# EAGLE board SCX3 (EAGLE 7.7.0)
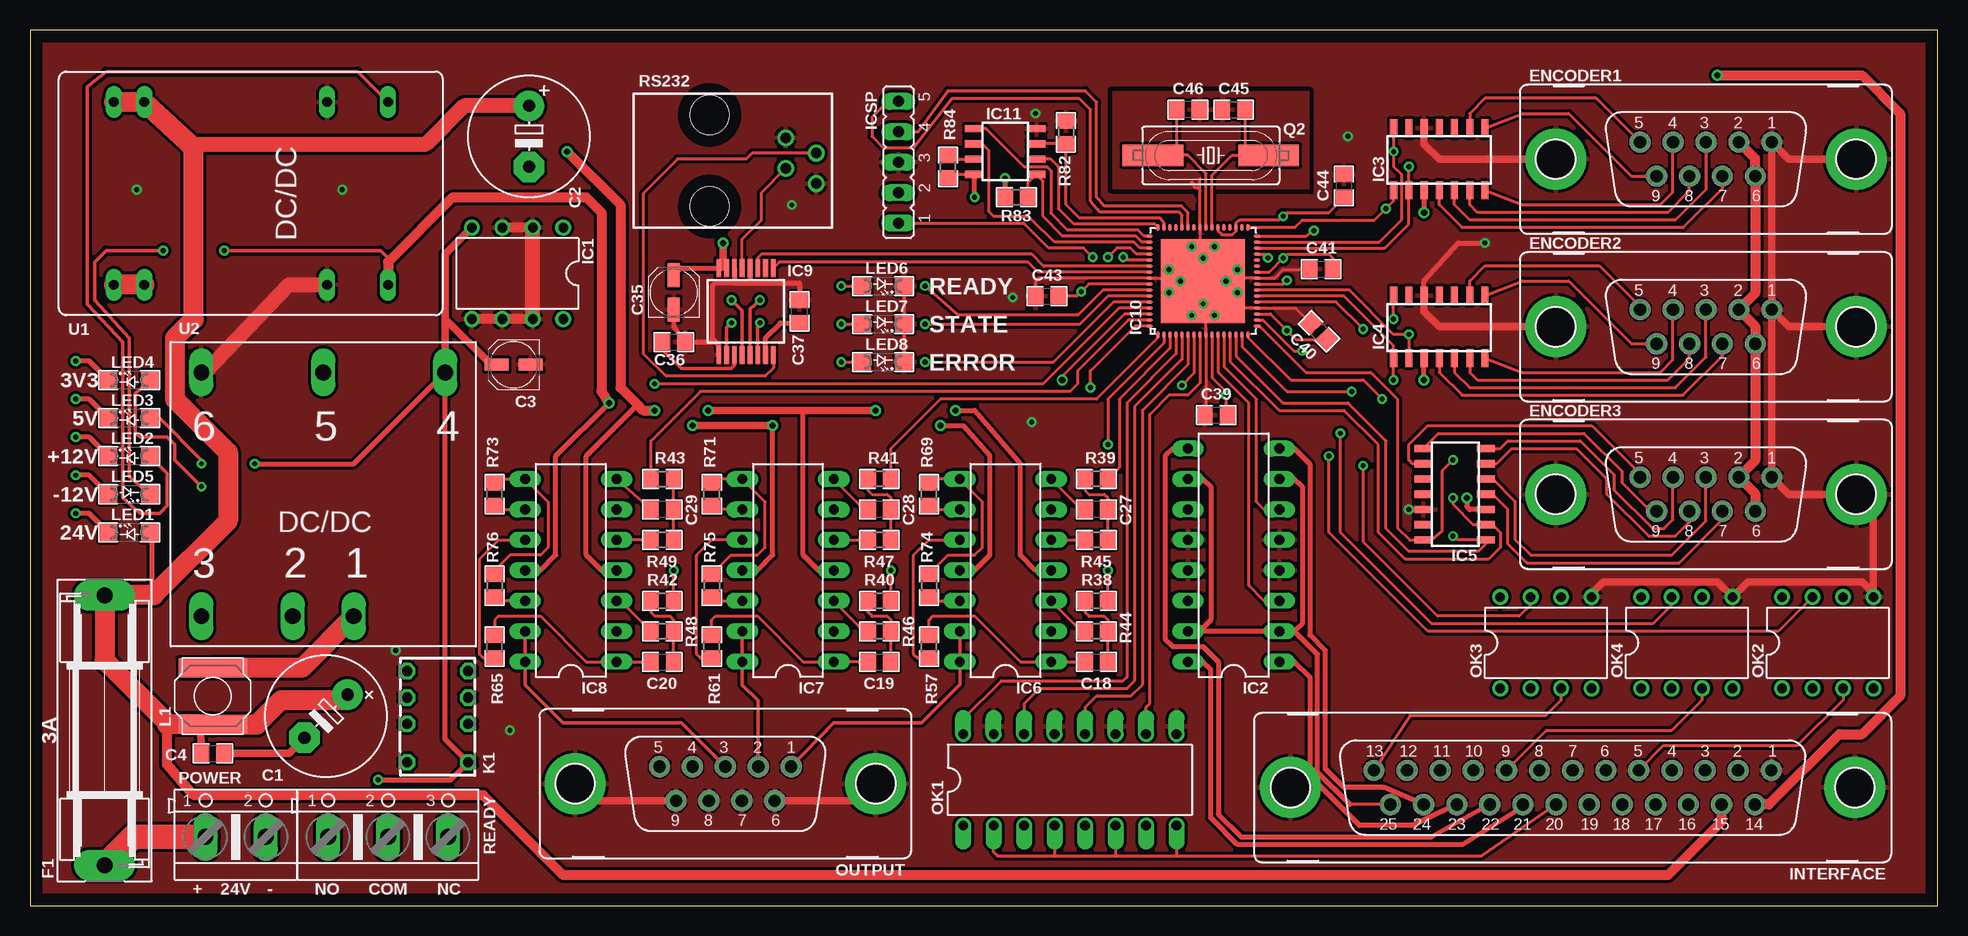
[diagram p0: board, top side]
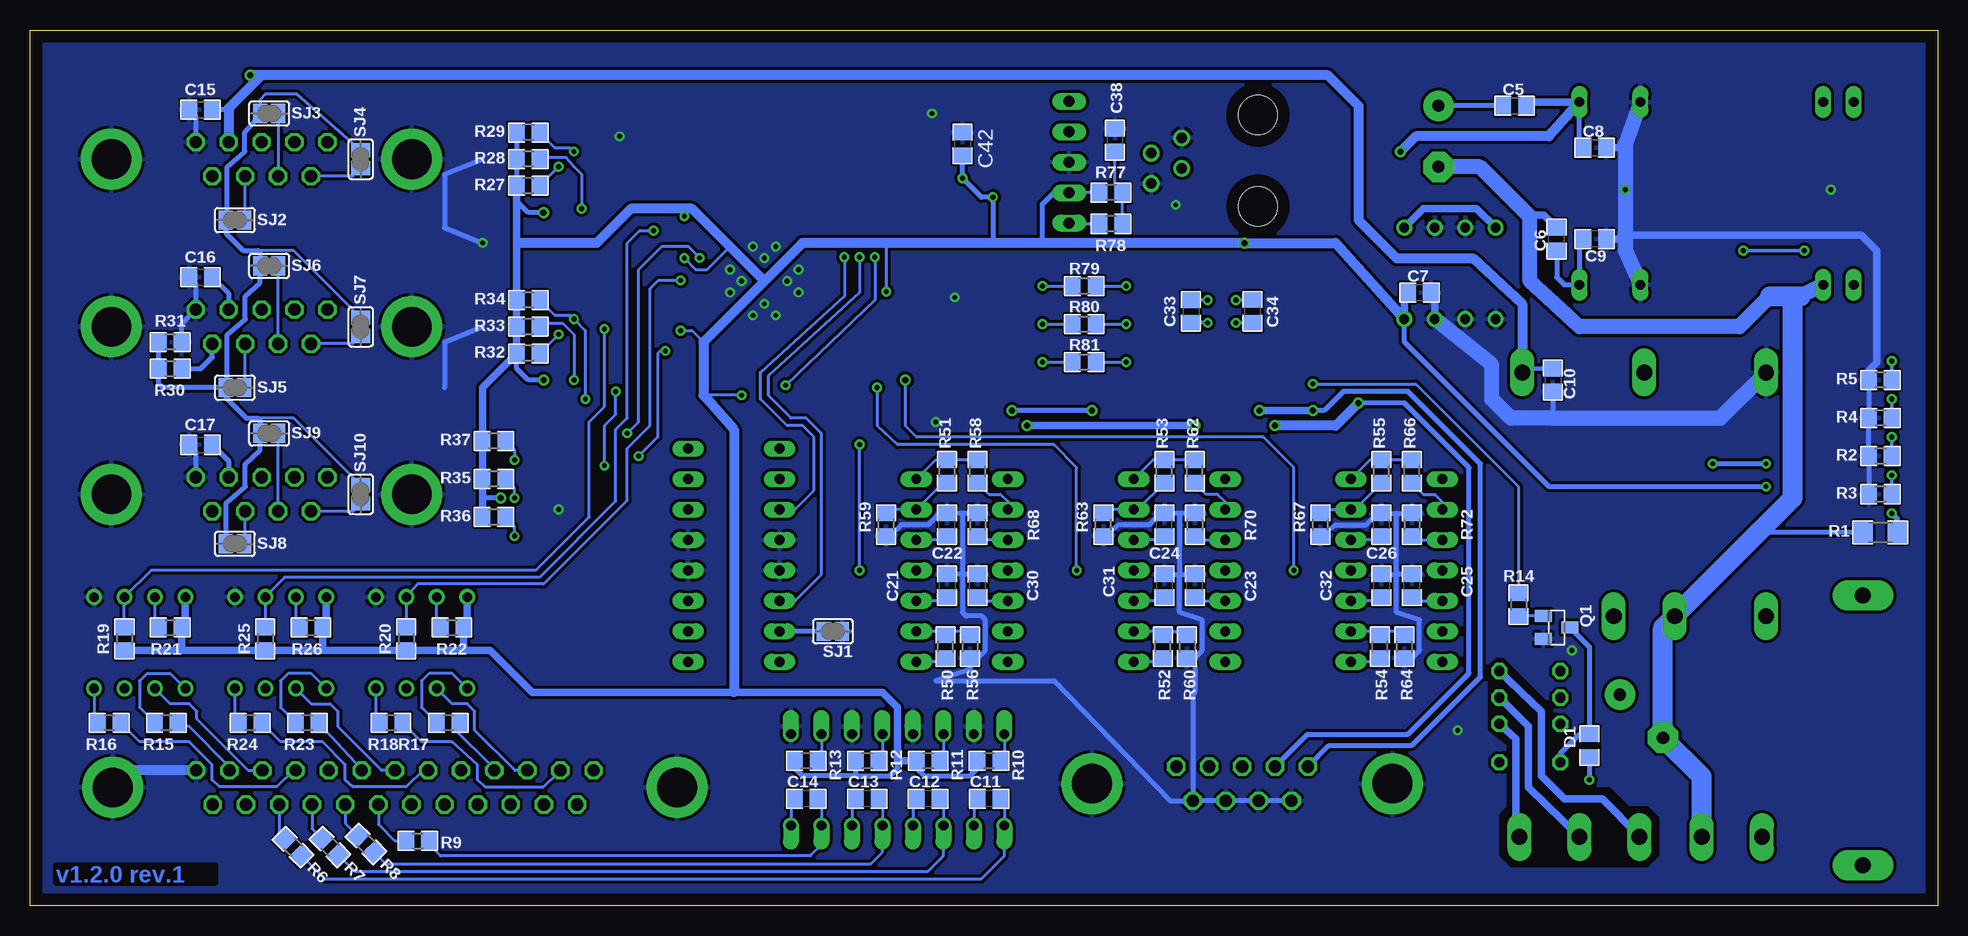
[diagram p1: board, bottom side, seen from below]

Size 159 x 73 mm. Coordinates in mm from the lower left corner, seen from the top.
Outline: 0,0 159,0 159,73 0,73 0,0
Copper layers (1*16): Top 0.035mm / dielectric 1.5mm / Bottom 0.035mm
Design rules "default *": minimum track width 0.15mm, minimum drill 0.4mm, track to track 0.2mm, track to pad 0.2mm, pad to pad 0.2mm, via to via 0.2mm, smd to smd 0.2mm, copper to edge 40mil, drill to drill 8mil, minimum pad ring 10mil, minimum via ring 8mil, stop-mask expansion 4mil, vias tented up to drill 0mil, thermal gap 10mil
Net classes: 0 default: clearance 0.2 mm; 1 3.3V: width 0.813 mm, drill 0.508 mm, clearance 0.2 mm; 2 5V: width 0.813 mm, drill 0.508 mm, clearance 0.2 mm; 3 12V: width 0.813 mm, drill 0.508 mm, clearance 0.2 mm; 4 24V: width 0.813 mm, drill 0.508 mm, clearance 0.2 mm; 5 SIGNAL: width 0.254 mm, drill 0.508 mm, clearance 1 mm to class 4, clearance 0.2 mm
tKeepout: area 0,0 to 2,72; area 155,0 to 157,72; area 0,70 to 157,72; area 0,0 to 157,2

## Footprints (pad centres in the part's own frame; a part is rotated, then mirrored left to right if it is on the bottom)
E5-10,5 = drill 1.016 pad 2.54: + -2.54,0 | drill 1.016 pad 2.54 octagon: - 2.54,0
UD-4X5,8_NICHICON = smd 2 x 1: + 1.425,0; - -1.425,0
C0805 = smd 1.3 x 1.5: 1 -0.95,0; 2 0.95,0
D0805 = smd 1.3 x 1.5: 1 -0.95,0; 2 0.95,0
F09VP = drill 1.016 octagon: 1 5.486,1.422; 2 2.743,1.422; 3 0,1.422; 4 -2.743,1.422; 5 -5.486,1.422; 6 4.115,-1.422; 7 1.372,-1.422; 8 -1.372,-1.422; 9 -4.115,-1.422 | drill 3.302 pad 5.08: G1 -12.522,0; G2 12.522,0
SH22,5 = drill 1.321 pad 2.54 long: 1 -11.252,0; 2 11.252,0
DIL08 = drill 0.813 pad 1.27: 1 -3.81,-3.81; 2 -1.27,-3.81; 3 1.27,-3.81; 4 3.81,-3.81; 5 3.81,3.81; 6 1.27,3.81; 7 -1.27,3.81; 8 -3.81,3.81
DIL16 = drill 0.813 long: 1 -8.89,-3.81; 2 -6.35,-3.81; 3 -3.81,-3.81; 4 -1.27,-3.81; 5 1.27,-3.81; 6 3.81,-3.81; 7 6.35,-3.81; 8 8.89,-3.81; 9 8.89,3.81; 10 6.35,3.81; 11 3.81,3.81; 12 1.27,3.81; 13 -1.27,3.81; 14 -3.81,3.81; 15 -6.35,3.81; 16 -8.89,3.81
SO14 = smd 0.6 x 1.5: 1 -3.81,-2.6; 2 -2.54,-2.6; 3 -1.27,-2.6; 4 0,-2.6; 5 1.27,-2.6; 6 2.54,-2.6; 7 3.81,-2.6; 8 3.81,2.6; 9 2.54,2.6; 10 1.27,2.6; 11 0,2.6; 12 -1.27,2.6; 13 -2.54,2.6; 14 -3.81,2.6
DIL14 = drill 0.813 long: 1 -7.62,-3.81; 2 -5.08,-3.81; 3 -2.54,-3.81; 4 0,-3.81; 5 2.54,-3.81; 6 5.08,-3.81; 7 7.62,-3.81; 8 7.62,3.81; 9 5.08,3.81; 10 2.54,3.81; 11 0,3.81; 12 -2.54,3.81; 13 -5.08,3.81; 14 -7.62,3.81
SSOP16 = smd 0.4 x 1.5: 1 -2.275,-3.625; 2 -1.625,-3.625; 3 -0.975,-3.625; 4 -0.325,-3.625; 5 0.325,-3.625; 6 0.975,-3.625; 7 1.625,-3.625; 8 2.275,-3.625; 9 2.275,3.625; 10 1.625,3.625; 11 0.975,3.625; 12 0.325,3.625; 13 -0.325,3.625; 14 -0.975,3.625; 15 -1.625,3.625; 16 -2.275,3.625
QFN64-9X9 = smd 0.55 x 0.28: 1 -4.477,3.75; 2 -4.477,3.25; 3 -4.477,2.75; 4 -4.477,2.25; 5 -4.477,1.75; 6 -4.477,1.25; 7 -4.477,0.75; 8 -4.477,0.25; 9 -4.477,-0.25; 10 -4.477,-0.75; 11 -4.477,-1.25; 12 -4.477,-1.75; 13 -4.477,-2.25; 14 -4.477,-2.75; 15 -4.477,-3.25; 16 -4.477,-3.75; 33 4.477,-3.75; 34 4.477,-3.25; 35 4.477,-2.75; 36 4.477,-2.25; 37 4.477,-1.75; 38 4.477,-1.25; 39 4.477,-0.75; 40 4.477,-0.25; 41 4.477,0.25; 42 4.477,0.75; 43 4.477,1.25; 44 4.477,1.75; 45 4.477,2.25; 46 4.477,2.75; 47 4.477,3.25; 48 4.477,3.75 | smd 0.28 x 0.55: 17 -3.75,-4.477; 18 -3.25,-4.477; 19 -2.75,-4.477; 20 -2.25,-4.477; 21 -1.75,-4.477; 22 -1.25,-4.477; 23 -0.75,-4.477; 24 -0.25,-4.477; 25 0.25,-4.477; 26 0.75,-4.477; 27 1.25,-4.477; 28 1.75,-4.477; 29 2.25,-4.477; 30 2.75,-4.477; 31 3.25,-4.477; 32 3.75,-4.477; 49 3.75,4.477; 50 3.25,4.477; 51 2.75,4.477; 52 2.25,4.477; 53 1.75,4.477; 54 1.25,4.477; 55 0.75,4.477; 56 0.25,4.477; 57 -0.25,4.477; 58 -0.75,4.477; 59 -1.25,4.477; 60 -1.75,4.477; 61 -2.25,4.477; 62 -2.75,4.477; 63 -3.25,4.477; 64 -3.75,4.477 | smd 7 x 7: EXP 0,0
SO8 = smd 0.6 x 1.5: 1 -1.905,-2.6; 2 -0.635,-2.6; 3 0.635,-2.6; 4 1.905,-2.6; 5 1.905,2.6; 6 0.635,2.6; 7 -0.635,2.6; 8 -1.905,2.6
JP5 = drill 0.914 long: 1 -3.81,0; 2 -1.27,0; 3 1.27,0; 4 3.81,0; 5 6.35,0
F25VP = drill 1.016 octagon: 1 16.561,1.422; 2 13.792,1.422; 3 11.049,1.422; 4 8.28,1.422; 5 5.512,1.422; 6 2.769,1.422; 7 0,1.422; 8 -2.769,1.422; 9 -5.512,1.422; 10 -8.28,1.422; 11 -11.049,1.422; 12 -13.792,1.422; 13 -16.561,1.422; 14 15.189,-1.422; 15 12.421,-1.422; 16 9.652,-1.422; 17 6.909,-1.422; 18 4.14,-1.422; 19 1.372,-1.422; 20 -1.372,-1.422; 21 -4.14,-1.422; 22 -6.909,-1.422; 23 -9.652,-1.422; 24 -12.421,-1.422; 25 -15.189,-1.422 | drill 3.302 pad 5.08: G1 -23.52,0; G2 23.52,0
G6K-2P-Y = drill 0.85 octagon: 1 0,-2.54; 2 3.2,-2.54; 3 5.4,-2.54; 4 7.6,-2.54; 5 7.6,2.54; 6 5.4,2.54; 7 3.2,2.54; 8 0,2.54
DJNR6028 = smd 1.6 x 5.69: A -2.362,0; B 2.362,0
SML1206 = smd 1.5 x 1.5: A 1.75,0; C -1.75,0
DIL16' = drill 0.813 offset: 1 -8.89,-3.81; 2 -6.35,-3.81; 3 -3.81,-3.81; 4 -1.27,-3.81; 5 1.27,-3.81; 6 3.81,-3.81; 7 6.35,-3.81; 8 8.89,-3.81; 9 8.89,3.81; 10 6.35,3.81; 11 3.81,3.81; 12 1.27,3.81; 13 -1.27,3.81; 14 -3.81,3.81; 15 -6.35,3.81; 16 -8.89,3.81
AK500/2 = drill 1.321 long: 1 -2.515,0; 2 2.515,0
SOT23 = smd 1 x 1.4: 1 -0.95,-1.1; 2 0.95,-1.1; 3 0,1.1
SM49 = smd 5.08 x 1.778: 1 -4.826,0; 2 4.826,0
R1206 = smd 1.6 x 1.803: 1 -1.422,0; 2 1.422,0
R0805 = smd 1.3 x 1.5: 1 -0.95,0; 2 0.95,0
AK500/3 = drill 1.321 long: 1 -5.004,0; 2 0,0; 3 5.004,0
RJ-9 = drill 0.889: 1 -1.905,6.35; 2 -0.635,8.89; 3 0.635,6.35; 4 1.905,8.89 | hole 3.251: 3.81,0; -3.81,0
SJ = smd 1.168 x 1.6: 1 -0.762,0; 2 0.762,0
AM6T = drill 0.813 long: 2 -7.62,11.43; 3 -7.62,8.89; 9 -7.62,-6.35; 11 -7.62,-11.43; 14 7.62,-11.43; 16 7.62,-6.35; 22 7.62,8.89; 23 7.62,11.43
AM10CW-NZ = drill 1.321 long: 1 2.54,-10.16; 2 -2.54,-10.16; 3 -10.16,-10.16; 4 10.16,10.16; 5 0,10.16; 6 -10.16,10.16

## Placement (x,y rotation side)
C1  330uF  [E5-10,5]  24.67,15.78 225 top
C2  220uF  [E5-10,5]  41.59,64.14 270 top
C3  10uF  [UD-4X5,8_NICHICON]  40.32,45.09 180 top
C4  1uF  [C0805]  15.24,12.7 0 top
C5  1nF/1KV  [C0805]  35.24,66.67 0 bottom
C6  1nF/1KV  [C0805]  31.75,55.56 90 bottom
C7  10uF  [C0805]  43.18,51.12 0 bottom
C8  1uF  [C0805]  28.57,63.18 0 bottom
C9  1uF  [C0805]  28.57,55.56 180 bottom
C10  10uF  [C0805]  32.07,43.81 270 bottom
C11  100n  [C0805]  79.05,8.89 180 bottom
C12  100n  [C0805]  84.14,8.89 180 bottom
C13  100n  [C0805]  89.21,8.89 180 bottom
C14  100n  [C0805]  94.3,8.89 180 bottom
C15  10uF  [C0805]  144.78,66.36 0 bottom
C16  10uF  [C0805]  144.78,52.39 0 bottom
C17  10uF  [C0805]  144.78,38.42 0 bottom
C18  10n  [C0805]  88.9,20.32 0 top
C19  10n  [C0805]  70.8,20.32 0 top
C20  10n  [C0805]  52.7,20.32 0 top
C21  33n  [C0805]  82.55,26.67 270 bottom
C22  33n  [C0805]  82.55,31.75 90 bottom
C23  33n  [C0805]  64.45,26.67 270 bottom
C24  33n  [C0805]  64.45,31.75 90 bottom
C25  33n  [C0805]  46.35,26.67 270 bottom
C26  33n  [C0805]  46.35,31.75 90 bottom
C27  10n  [C0805]  88.9,33.02 180 top
C28  10n  [C0805]  70.8,33.02 180 top
C29  10n  [C0805]  52.7,33.02 180 top
C30  33n  [C0805]  80.01,26.67 90 bottom
C31  33n  [C0805]  61.91,26.67 90 bottom
C32  33n  [C0805]  43.81,26.67 90 bottom
C33  100n  [C0805]  62.23,49.53 270 bottom
C34  100n  [C0805]  57.09,49.54 90 bottom
C35  100n  [UD-4X5,8_NICHICON]  53.66,51.12 90 top
C36  100n  [C0805]  53.66,46.99 0 top
C37  100n  [C0805]  64.14,49.53 90 top
C38  100n  [C0805]  68.58,63.82 270 bottom
C39  100n  [C0805]  98.87,40.89 0 top
C40  100n  [C0805]  107.44,47.88 135 top
C41  100n  [C0805]  107.63,53.07 0 top
C42  100n  [C0805]  81.28,63.5 270 bottom
C43  100n  [C0805]  84.77,50.8 0 top
C44  100n  [C0805]  109.54,60.01 90 top
C45  27p  [C0805]  100.33,66.36 0 top
C46  27p  [C0805]  96.52,66.36 180 top
D1  1N4148SMD-0805  [D0805]  29.02,13.34 270 bottom
ENCODER1  [F09VP]  139.7,62.23 0 top
ENCODER2  [F09VP]  139.7,48.26 0 top
ENCODER3  [F09VP]  139.7,34.29 0 top
F1  3A  [SH22,5]  6.22,14.61 90 top
IC1  MAX604  [DIL08]  40.64,52.7 180 top
IC2  ULN2074BN  [DIL16]  100.33,29.21 90 top
IC3  LM339D  [SO14]  117.47,62.23 0 top
IC4  LM339D  [SO14]  117.47,48.26 0 top
IC5  LM339D  [SO14]  118.75,34.29 90 top
IC6  LM324N  [DIL14]  81.31,27.94 90 top
IC7  LM324N  [DIL14]  63.18,27.94 90 top
IC8  LM324N  [DIL14]  45.09,27.94 90 top
IC9  MAX3221CAE  [SSOP16]  59.69,49.53 0 top
IC10  PIC32MK1024MCF064  [QFN64-9X9]  97.79,52.07 90 top
IC11  M95040  [SO8]  81.28,62.87 90 top
ICSP  ICSP  [JP5]  72.39,60.71 90 top
INTERFACE  [F25VP]  128.58,9.84 0 top
K1  G6K-2P-Y  [G6K-2P-Y]  33.97,11.94 90 top
L1  4,7uH  [DJNR6028]  15.24,17.46 90 top
LED1  LED 24V  [SML1206]  8.26,31.11 0 top
LED2  LED +12V  [SML1206]  8.26,37.47 0 top
LED3  LED 5V  [SML1206]  8.26,40.64 0 top
LED4  LED 3V3  [SML1206]  8.26,43.81 0 top
LED5  LED -12V  [SML1206]  8.26,34.29 180 top
LED6  LED READY  [SML1206]  71.12,51.66 180 top
LED7  LED STATE  [SML1206]  71.12,48.48 180 top
LED8  LED ERROR  [SML1206]  71.12,45.31 180 top
OK1  LTV844  [DIL16']  86.67,10.48 0 top
OK2  TLP2662F  [DIL08]  149.86,21.91 0 top
OK3  TLP2662F  [DIL08]  126.36,21.91 0 top
OK4  TLP2662F  [DIL08]  138.11,21.91 0 top
OUTPUT  [F09VP]  57.96,10.16 0 top
POWER  12/24V_CON  [AK500/2]  17.14,5.71 0 top
Q1  BC848SMD  [SOT23]  31.75,23.18 270 bottom
Q2  20MHz 18pF  [SM49]  98.42,62.55 0 top
R1  2K2  [R1206]  4.76,31.11 180 bottom
R2  1K  [R0805]  4.76,37.47 180 bottom
R3  1K  [R0805]  4.76,34.29 180 bottom
R4  330  [R0805]  4.76,40.64 180 bottom
R5  100  [R0805]  4.76,43.81 180 bottom
R6  1K  [R0805]  137.06,4.86 315 bottom
R7  1K  [R0805]  133.98,4.89 315 bottom
R8  1K  [R0805]  130.99,5.13 315 bottom
R9  1K  [R0805]  126.68,5.4 0 bottom
R10  4K7  [R0805]  79.06,12.06 180 bottom
R11  4K7  [R0805]  84.13,12.06 180 bottom
R12  4K7  [R0805]  89.22,12.06 180 bottom
R13  4K7  [R0805]  94.29,12.06 180 bottom
R14  4K7  [R0805]  34.92,25.08 270 bottom
R15  470  [R0805]  147.63,15.24 180 bottom
R16  470  [R0805]  152.4,15.24 180 bottom
R17  470  [R0805]  124.14,15.24 180 bottom
R18  470  [R0805]  128.9,15.24 180 bottom
R19  4K7  [R0805]  151.13,22.23 270 bottom
R20  4K7  [R0805]  127.63,22.23 270 bottom
R21  4K7  [R0805]  147.32,23.18 0 bottom
R22  4K7  [R0805]  123.82,23.18 0 bottom
R23  470  [R0805]  135.89,15.24 180 bottom
R24  470  [R0805]  140.65,15.24 180 bottom
R25  4K7  [R0805]  139.38,22.23 270 bottom
R26  4K7  [R0805]  135.57,23.18 0 bottom
R27  4K7  [R0805]  117.47,60.01 180 bottom
R28  4K7  [R0805]  117.47,62.23 180 bottom
R29  4K7  [R0805]  117.47,64.45 180 bottom
R30  1K  [R0805]  147.32,44.77 0 bottom
R31  470  [R0805]  147.32,46.99 180 bottom
R32  4K7  [R0805]  117.47,46.04 180 bottom
R33  4K7  [R0805]  117.47,48.26 180 bottom
R34  4K7  [R0805]  117.47,50.48 180 bottom
R35  4K7  [R0805]  120.33,35.56 180 bottom
R36  4K7  [R0805]  120.33,32.38 180 bottom
R37  4K7  [R0805]  120.33,38.73 180 bottom
R38  22K  [R0805]  88.9,25.4 180 top
R39  22K  [R0805]  88.9,35.56 180 top
R40  22K  [R0805]  70.8,25.4 180 top
R41  22K  [R0805]  70.8,35.56 180 top
R42  22K  [R0805]  52.7,25.4 180 top
R43  22K  [R0805]  52.7,35.56 0 top
R44  10K  [R0805]  88.9,22.86 180 top
R45  10K  [R0805]  88.9,30.48 180 top
R46  10K  [R0805]  70.8,22.86 180 top
R47  10K  [R0805]  70.8,30.48 180 top
R48  10K  [R0805]  52.7,22.86 180 top
R49  10K  [R0805]  52.7,30.48 180 top
R50  22K  [R0805]  82.68,21.59 90 bottom
R51  22K  [R0805]  82.55,36.2 90 bottom
R52  22K  [R0805]  64.58,21.59 90 bottom
R53  22K  [R0805]  64.45,36.2 90 bottom
R54  22K  [R0805]  46.48,21.59 90 bottom
R55  22K  [R0805]  46.35,36.2 90 bottom
R56  47K  [R0805]  80.64,21.59 270 bottom
R57  22K  [R0805]  74.93,21.59 90 top
R58  22K  [R0805]  80.01,36.2 90 bottom
R59  47K  [R0805]  87.63,31.75 90 bottom
R60  47K  [R0805]  62.55,21.59 270 bottom
R61  22K  [R0805]  56.83,21.59 90 top
R62  22K  [R0805]  61.91,36.2 90 bottom
R63  47K  [R0805]  69.53,31.75 90 bottom
R64  47K  [R0805]  44.45,21.59 270 bottom
R65  22K  [R0805]  38.73,21.59 90 top
R66  22K  [R0805]  43.81,36.2 90 bottom
R67  47K  [R0805]  51.44,31.75 90 bottom
R68  47K  [R0805]  80.01,31.75 270 bottom
R69  47K  [R0805]  74.93,34.29 90 top
R70  47K  [R0805]  61.91,31.75 270 bottom
R71  47K  [R0805]  56.83,34.29 90 top
R72  47K  [R0805]  43.81,31.75 270 bottom
R73  47K  [R0805]  38.73,34.29 90 top
R74  22K  [R0805]  74.93,26.67 270 top
R75  22K  [R0805]  56.83,26.67 270 top
R76  22K  [R0805]  38.73,26.67 270 top
R77  10K  [R0805]  68.9,59.44 180 bottom
R78  1K  [R0805]  68.9,56.83 180 bottom
R79  100  [R0805]  71.12,51.66 0 bottom
R80  100  [R0805]  71.12,48.48 0 bottom
R81  100  [R0805]  71.12,45.31 0 bottom
R82  4K7  [R0805]  86.36,64.45 270 top
R83  4K7  [R0805]  82.23,59.05 0 top
R84  4K7  [R0805]  76.52,61.59 90 top
READY  READY  [AK500/3]  29.84,5.71 0 top
RS232  RJ-9  [RJ-9]  56.64,62.1 270 top
SJ1  [SJ]  92.08,22.86 180 bottom
SJ2  [SJ]  141.92,57.15 0 bottom
SJ3  [SJ]  139.06,66.04 0 bottom
SJ4  [SJ]  131.44,62.23 270 bottom
SJ5  [SJ]  141.92,43.18 0 bottom
SJ6  [SJ]  139.06,53.34 0 bottom
SJ7  [SJ]  131.44,48.26 270 bottom
SJ8  [SJ]  141.92,30.16 0 bottom
SJ9  [SJ]  139.06,39.37 0 bottom
SJ10  [SJ]  131.44,34.29 270 bottom
U1  AM6T-2412D-NZ  [AM6T]  18.41,59.37 90 top
U2  AM10CW-2405S-NZ  [AM10CW-NZ]  24.45,34.29 0 top

## Library data of the parts
C1-C46 R2-R84 = rcl
D1 = diode
ENCODER1-ENCODER3 OUTPUT = ServoController; OC_FARNELL: unknown; OC_NEWARK: unknown
F1 = fuse; MF: SCHURTER; MPN: 0031.8201; OC_FARNELL: 1162740; OC_NEWARK: 96F8317
IC1 IC6-IC8 IC10 ICSP L1 OK1-OK4 = ServoController
IC2 = uln-udn
IC3-IC5 = linear
IC9 = ServoController; MF: MAXIM; MPN: MAX3221CAE+; OC_FARNELL: 9724508; OC_NEWARK: 53K7474
IC11 RS232 U1 = SCX3
INTERFACE = con-subd; OC_FARNELL: unknown; OC_NEWARK: unknown
K1 = ServoController; MF: OMRON COMPONENTS USA; MPN: G6K-2P-Y DC12; OC_FARNELL: 3937276; OC_NEWARK: 34C3464
LED1-LED8 = led
POWER READY = con-ptr500; OC_FARNELL: unknown; OC_NEWARK: unknown
Q1 = transistor-npn
Q2 = crystal; OC_FARNELL: unknown; OC_NEWARK: unknown
R1 = rcl; POWER: 0.22W
SJ1-SJ10 = jumper
U2 = ServoController; OUT-VOLTAGE: 5V

## Nets
3V3 [3.3V]: C7.1 C35.+ C39.2 C40.1 C41.2 C42.2 C43.2 C44.1 IC1.8 IC3.3 IC4.3 IC5.3 IC9.15 IC9.16 IC10.10 IC10.19 IC10.26 IC10.35 IC10.38 IC10.57 IC11.8 ICSP.2 LED4.A OK2.8 OK3.8 OK4.8 R10.2 R11.2 R12.2 R13.2 R19.2 R20.2 R21.2 R22.2 R25.2 R26.2 R27.2 R28.2 R29.2 R32.2 R33.2 R34.2 R35.2 R36.2 R37.2 R77.2 R83.1 R84.1
5V: C3.+ C10.1 C15.2 C16.2 C17.2 D1.2 ENCODER1.2 ENCODER1.6 ENCODER2.2 ENCODER2.6 ENCODER3.2 ENCODER3.6 IC1.1 IC1.4 INTERFACE.14 K1.1 LED3.A R30.2 U2.4
24V: C1.+ C2.+ C4.1 C5.1 F1.2 INTERFACE.15 L1.A LED1.A U1.22 U1.23
24VGND [24V]: C1.- C2.- C4.2 C6.2 POWER.2 R1.2 U1.2 U1.3 U2.2
!HOLD: IC11.7 R84.2
!MCLR: IC10.7 ICSP.1 R78.2
!MSS: IC10.50 IC11.1 R83.2
!MWP: IC10.47 IC11.3 R82.2
+12V [12V]: C5.2 C8.1 IC6.4 IC7.4 IC8.4 LED2.A OUTPUT.5 U1.14
-12V [12V]: C6.1 C9.2 IC6.11 IC7.11 IC8.11 LED5.C OUTPUT.4 U1.11
CH1_A+: ENCODER1.3 IC3.5
CH1_A-: ENCODER1.7 IC3.4 SJ2.2
CH1_B+: ENCODER1.4 IC3.7
CH1_B-: ENCODER1.8 IC3.6 SJ3.2
CH1_CMD: IC6.13 IC6.14 OUTPUT.1
CH1_DIR: IC10.21 OK2.6 R19.1
CH1_DIR_H: INTERFACE.4 R16.1
CH1_DIR_L: INTERFACE.5 OK2.3
CH1_H: IC10.2 R38.1
CH1_I+: ENCODER1.5 IC3.9
CH1_I-: ENCODER1.9 IC3.8 SJ4.2
CH1_L: IC10.3 R39.1
CH1_QE_A: IC3.2 IC10.30 R27.1
CH1_QE_B: IC3.1 IC10.33 R28.1
CH1_QE_I: IC3.14 IC10.31 R29.1
CH1_STEP: IC10.18 OK2.7 R21.1
CH1_STEP_H [SIGNAL]: INTERFACE.2 R15.1
CH1_STEP_L: INTERFACE.3 OK2.2
CH2_A+: ENCODER2.3 IC4.5
CH2_A-: ENCODER2.7 IC4.4 SJ5.2
CH2_B+: ENCODER2.4 IC4.7
CH2_B-: ENCODER2.8 IC4.6 SJ6.2
CH2_CMD: IC7.13 IC7.14 OUTPUT.2
CH2_DIR: IC10.32 OK4.6 R25.1
CH2_DIR_H: INTERFACE.8 R24.1
CH2_DIR_L: INTERFACE.9 OK4.3
CH2_H: IC10.64 R40.1
CH2_I+: ENCODER2.5 IC4.9
CH2_I-: ENCODER2.9 IC4.8 SJ7.2
CH2_L: IC10.1 R41.1
CH2_QE_A: IC4.2 IC10.23 R32.1
CH2_QE_B: IC4.1 IC10.22 R33.1
CH2_QE_I: IC4.14 IC10.16 R34.1
CH2_STEP [SIGNAL]: IC10.29 OK4.7 R26.1
CH2_STEP_H: INTERFACE.6 R23.1
CH2_STEP_L: INTERFACE.7 OK4.2
CH3_A+: ENCODER3.3 IC5.5
CH3_A-: ENCODER3.7 IC5.4 SJ8.2
CH3_B+: ENCODER3.4 IC5.7
CH3_B-: ENCODER3.8 IC5.6 SJ9.2
CH3_CMD: IC8.13 IC8.14 OUTPUT.3
CH3_DIR: IC10.24 OK3.6 R20.1
CH3_DIR_H: INTERFACE.12 R18.1
CH3_DIR_L: INTERFACE.13 OK3.3
CH3_H: IC10.62 R42.1
CH3_I+: ENCODER3.5 IC5.9
CH3_I-: ENCODER3.9 IC5.8 SJ10.2
CH3_L: IC10.63 R43.1
CH3_QE_A [SIGNAL]: IC5.2 IC10.13 R35.1
CH3_QE_B [SIGNAL]: IC5.1 IC10.14 R36.1
CH3_QE_I: IC5.14 IC10.17 R37.1
CH3_STEP: IC10.15 OK3.7 R22.1
CH3_STEP_H: INTERFACE.10 R17.1
CH3_STEP_L: INTERFACE.11 OK3.2
DI1: IC10.4 OK1.16 R10.1
DI1_CON: INTERFACE.16 R6.1
DI2: IC10.5 OK1.14 R11.1
DI2_CON: INTERFACE.17 R7.1
DI3: IC10.6 OK1.12 R12.1
DI3_CON: INTERFACE.18 R8.1
DI4: IC10.8 OK1.10 R13.1
DI4_CON: INTERFACE.19 R9.1
DI_COM_CON: C11.2 C12.2 C13.2 C14.2 INTERFACE.20 OK1.2 OK1.4 OK1.6 OK1.8
DO1: IC2.14 IC10.52
DO1_CON: IC2.16 INTERFACE.21
DO1H_CON: D1.1 K1.8 Q1.3
DO2: IC2.11 IC10.53
DO2_CON: IC2.9 INTERFACE.22
DO3: IC2.3 IC10.11
DO3_CON: IC2.1 INTERFACE.23
DO4: IC2.6 IC10.12
DO4_CON: IC2.8 INTERFACE.24
DO_COM_CON: IC2.2 IC2.7 IC2.10 IC2.15 INTERFACE.25 SJ1.2
GND: C3.- C7.2 C8.2 C9.1 C10.2 C15.1 C16.1 C17.1 C21.1 C22.2 C23.1 C24.2 C25.1 C26.2 C30.2 C31.2 C32.2 C35.- C36.2 C37.2 C38.1 C39.1 C40.2 C41.1 C42.1 C43.1 C44.2 C45.1 C46.1 ENCODER1.1 ENCODER1.G1 ENCODER1.G2 ENCODER2.1 ENCODER2.G1 ENCODER2.G2 ENCODER3.1 ENCODER3.G1 ENCODER3.G2 IC1.2 IC1.3 IC1.5 IC1.6 IC1.7 IC2.4 IC2.5 IC2.12 IC2.13 IC3.12 IC4.12 IC5.12 IC9.1 IC9.12 IC9.14 IC10.9 IC10.20 IC10.25 IC10.41 IC10.56 IC10.EXP IC11.4 ICSP.3 INTERFACE.1 INTERFACE.G1 INTERFACE.G2 LED6.C LED7.C LED8.C OK1.9 OK1.11 OK1.13 OK1.15 OK2.5 OK3.5 OK4.5 OUTPUT.6 OUTPUT.7 OUTPUT.8 OUTPUT.9 OUTPUT.G1 OUTPUT.G2 Q1.2 R2.2 R3.2 R4.2 R5.2 R31.1 R56.2 R59.1 R60.2 R63.1 R64.2 R67.1 R68.1 R70.1 R72.1 R82.1 RS232.1 RS232.4 SJ1.1 U1.9 U1.16 U2.6
LED_ERROR: IC10.60 R81.1
LED_READY: IC10.58 R79.1
LED_STATE: IC10.59 R80.1
MSCK: IC10.51 IC11.6
MSDI: IC10.48 IC11.2
MSDO: IC10.49 IC11.5
N$1: IC6.6 R51.1 R59.2
N$2: IC6.2 R50.2 R56.1
N$3: LED1.C R1.1
N$4: L1.B U2.1
N$5: C18.1 IC6.1 R50.1 R57.2
N$6: C21.2 IC6.3 R44.2
N$7: C18.2 R38.2 R44.1
N$8: C30.1 IC6.12 R74.2
N$9: IC6.8 R69.2 R74.1
N$10: IC6.9 R58.1 R69.1
N$11: C27.2 IC6.7 R51.2 R58.2
N$12: F1.1 POWER.1
N$13: C22.1 IC6.5 R45.2
N$14: C27.1 R39.2 R45.1
N$15: IC6.10 R57.1 R68.2
N$16: OK4.4 R24.2
N$17: OK4.1 R23.2
N$18: OK3.4 R18.2
N$19: OK3.1 R17.2
N$20: IC7.6 R53.1 R63.2
N$21: IC7.2 R52.2 R60.1
N$22: C19.1 IC7.1 R52.1 R61.2
N$23: C23.2 IC7.3 R46.2
N$24: C19.2 R40.2 R46.1
N$25: C31.1 IC7.12 R75.2
N$26: IC7.8 R71.2 R75.1
N$27: IC7.9 R62.1 R71.1
N$28: C28.2 IC7.7 R53.2 R62.2
N$29: C24.1 IC7.5 R47.2
N$30: C28.1 R41.2 R47.1
N$31: IC7.10 R61.1 R70.2
N$32: IC8.6 R55.1 R67.2
N$33: IC8.2 R54.2 R64.1
N$34: C20.1 IC8.1 R54.1 R65.2
N$35: C25.2 IC8.3 R48.2
N$36: C20.2 R42.2 R48.1
N$37: C32.1 IC8.12 R76.2
N$38: IC8.8 R73.2 R76.1
N$39: IC8.9 R66.1 R73.1
N$40: C29.2 IC8.7 R55.2 R66.2
N$41: C26.1 IC8.5 R49.2
N$42: C29.1 R43.2 R49.1
N$43: IC8.10 R65.1 R72.2
N$45: LED6.A R79.2
N$47: LED7.A R80.2
N$48: LED8.A R81.2
N$50: C34.2 IC9.4
N$51: C34.1 IC9.2
N$52: C33.2 IC9.6
N$53: C33.1 IC9.5
N$54: C36.1 IC9.3
N$55: C37.1 IC9.7
N$56: C12.1 OK1.3 R7.2
N$58: LED2.C R2.1
N$65: LED3.C R4.1
N$67: C38.2 R77.1 R78.1
N$69: Q1.1 R14.2
N$70: C13.1 OK1.5 R8.2
N$71: C14.1 OK1.7 R9.2
N$72: C11.1 OK1.1 R6.2
N$73: OK2.4 R16.2
N$74: OK2.1 R15.2
N$75: LED4.C R5.1
N$76: LED5.A R3.1
OSC1I: C45.2 IC10.39 Q2.2
OSC1O: C46.2 IC10.40 Q2.1
PGEC: IC10.44 ICSP.5
PGED: IC10.43 ICSP.4
REF: R30.1 R31.2 SJ2.1 SJ3.1 SJ4.1 SJ5.1 SJ6.1 SJ7.1 SJ8.1 SJ9.1 SJ10.1
RO1: IC10.61 R14.1
RO1_COM_CON: K1.3 READY.2
RO1_NC_CON: K1.2 READY.3
RO1_NO_CON: K1.4 READY.1
RS232_RX: IC9.8 RS232.2
RS232_TX: IC9.13 RS232.3
UART_RX: IC9.9 IC10.55
UART_TX: IC9.11 IC10.54

## Tracks (layer width: path | path; a pad name or v marks a point on that pad's centre or on a via)
3V3  (via drill 0.41, 0.51, 0.51 pad 0.91)
  Top 0.254: IC10.19 103.4,49.32 v104.78,47.94 105.51,47.21 C40.1 | IC10.10 98.54,44.02 99.69,42.86 v99.69,42.55 99.69,41.52 C39.2 | IC10.26 103.3,52.82 v104.46,53.98 104.78,54.29 108.27,54.29 108.58,53.98 C41.2 | 99.06,56.57 IC10.38 99.04,56.22 99.34,55.94 100.23,55.94 100.54,56.22 IC10.35 100.54,56.9 100.86,57.17 104.17,57.17 v104.46,57.47 104.78,57.78 108.27,57.78 C44.1 | IC10.57 88.27,51.82 v87.63,51.19 87.25,50.8 C43.2 | R84.1 76.83,60.96 IC11.8
  Top 0.305: 57.78,53.34 57.41,53.66 IC9.16 | LED4.A 8.79,42.7 8.79,39.37 9.21,39.05 11.43,39.05 12.06,38.42 12.06,37.15 v14.29,34.92
  Top 0.406: IC9.15 IC9.16 54.27,53.16 C35.+ | v116.2,43.81 IC4.3 | IC3.3 v116.2,57.78 | v78.74,59.05 78.74,60.9 IC11.8 | v81.28,60.64 R83.1 | v119.76,33.97 119.76,33.27 120.02,33.02 IC5.3
  Top 0.61: v57.78,55.24 57.78,53.34 | IC3.3
  Bottom 0.254: 87.63,55.24 v87.63,51.19 | v104.46,53.98 103.5,53.02 102.55,53.02 100.65,54.93 | v99.69,42.55 102.87,42.55 | v104.78,47.94 103.82,47.94 102.87,46.99 | v104.46,57.47 103.82,58.1 | R77.2 ICSP.2
  Bottom 0.406: R29.2 R28.2 R27.2 | v116.2,43.81 117.47,43.81 118.42,44.77 R32.2 | 90.17,10.79 94.61,10.79 95.24,11.43 R13.2 | R11.2 85.08,11.43 84.45,10.79 80.64,10.79 80.01,11.43 R10.2 | 146.05,23.5 R21.2 146.05,22.86 | 134.3,23.5 R26.2 | v14.29,34.92 32.38,34.92 44.45,46.99 IC1.8 | v116.2,57.78 117.47,57.78 118.42,58.73 | 118.11,55.24 118.42,55.24 | R12.2 90.17,10.79 | 90.17,10.79 87.31,10.79 86.68,11.43 86.68,12.06 | 74.61,55.24 74.61,58.48 73.66,59.44 ICSP.2 | 78.74,55.24 v78.74,59.05 79.69,59.05 v81.28,60.64 C42.2 | R36.2 121.28,33.66 | v119.76,33.97 121.28,33.97
  Bottom 0.61: R11.2 86.68,12.06 86.68,16.51 87.95,17.78 100.33,17.78 117.16,17.78 120.65,21.27 122.87,21.27 | OK2.8 146.05,23.5 | OK4.8 134.3,23.5 | R27.2 118.42,58.73 118.42,55.24 R34.2 R33.2 R32.2 121.28,43.18 R37.2 R35.2 121.28,33.97 R36.2 | 146.37,21.27 R25.2 134.62,21.27 | 146.37,21.27 R19.2 | 134.62,21.27 R20.2 122.87,21.27 | R21.2 146.37,21.27 | R26.2 134.62,21.27 | 122.87,21.27 R22.2 122.55,23.81 OK3.8 | IC1.8 44.45,50.8 C7.1
  Bottom 0.813: 97.79,52.07 94.61,55.24 87.63,55.24 78.74,55.24 74.61,55.24 v57.78,55.24 50.16,55.24 IC1.8 | 97.79,52.07 102.87,46.99 102.87,42.55 100.33,39.69 100.33,17.78 | 97.79,52.07 100.65,54.93 103.82,58.1 108.9,58.1 111.76,55.24 118.11,55.24
5V  (via drill 0.41, 0.51)
  Top 0.305: v14.29,36.83 14.29,37.15 10.79,40.64 LED3.A
  Top 0.406: LED3.A 10.48,40.64 | v18.73,36.83 26.99,36.83 U2.4 34.61,13.84 K1.1 35.05,10.48 v29.02,10.48
  Top 0.61: IC1.4 34.61,54.29 34.61,48.9 | 34.61,48.9 U2.4 | C3.+ 38.42,45.09 34.61,48.9
  Top 0.813: ENCODER1.2 143.81,62.28 ENCODER1.6 143.81,51.05 ENCODER2.2 143.81,48.31 ENCODER2.6 143.81,37.08 ENCODER3.2 143.81,34.34 ENCODER3.6 | v140.65,69.22 152.72,69.22 155.89,66.04 155.89,17.46 152.72,14.29 150.81,14.29 144.94,8.42 INTERFACE.14
  Bottom 0.406: R30.2 144.76,44.77 143.81,45.72 ENCODER2.6 | U2.4 34.24,44.81 C10.1 | v14.29,36.83 v18.73,36.83 | 142.44,66.48 142.56,66.36 C15.2 | C16.2 142.44,51.05 ENCODER2.2 | C17.2 142.44,37.08 ENCODER3.2 | D1.2 v29.02,10.48
  Bottom 0.61: IC1.4 38.42,58.1 42.86,58.1 IC1.1
  Bottom 0.813: 139.7,69.22 50.8,69.22 48.26,66.67 48.26,57.15 45.09,53.98 38.73,53.98 34.61,50.16 U2.4 | 139.7,69.22 142.44,66.48 ENCODER1.2 | 139.7,69.22 v140.65,69.22
24V
  Top 0.406: 10.16,30.96 10.16,25.88 | 13.65,63.5 13.65,63.18
  Top 0.61: C4.1 14.24,15.05 L1.A | LED1.A 10.16,30.96
  Top 0.813: 11.43,15.23 11.43,11.75 13.65,9.21 37.78,9.21 44.45,2.54 136.53,2.54 141,7.02 INTERFACE.15
  Top 1.27: L1.A 17.64,15.1 | 13.65,63.5 33.02,63.5 C5.1 C2.+
  Top 1.676: U1.23 U1.22 13.65,63.18 13.65,48.9 12.06,47.31 12.06,42.23 16.51,37.78 16.51,32.07 10.32,25.88 10.16,25.88 6.24,25.88 F1.2 6.22,20.44 11.43,15.23 11.43,15.1 L1.A | 17.64,15.1 18.91,15.1 20.95,17.14 26.04,17.14 C1.+
  Bottom 0.406: C5.1 C2.+
24VGND
  Top 0.61: C4.2 21.59,12.7 C1.-
  Top 1.676: U1.3 U1.2
  Bottom 0.406: U2.2 21.59,24.13 19.05,26.67 | R1.2 14.92,31.11
  Bottom 0.61: C6.2 32.8,57.56 34.12,57.56
  Bottom 1.27: U1.3 11.43,50.8 arc-90 12.06,50.16 | 13.97,50.8 16.51,48.26 29.84,48.26 33.97,52.07 33.97,57.47 34.12,57.56 38.15,61.59 C2.-
  Bottom 1.676: 13.97,50.8 11.43,50.8 | 12.06,50.16 12.06,33.97 14.92,31.11 U2.2 22.88,23.16 C1.- 19.66,10.77 POWER.2
!HOLD
  Top 0.254: R84.2 76.83,62.23 IC11.7
!MCLR  (via drill 0.41)
  Top 0.254: IC10.7 97.04,44.4 v96.01,43.37 | v88.58,54.07 87.83,54.82 84.9,54.82 82.82,56.9 ICSP.1
  Bottom 0.254: v88.58,54.07 88.58,50.48 v96.01,43.37 | R78.2 72.33,56.83 ICSP.1
!MSS
  Top 0.254: IC10.50 92.69,55.32 92.19,55.82 86.04,55.82 84.45,57.47 84.45,60.38 IC11.1 83.18,60.26 R83.2
!MWP
  Top 0.254: IC10.47 94.54,56.91 94.18,57.32 87.46,57.32 86.36,58.42 R82.2 IC11.3
+12V  (via drill 0.51)
  Top 0.305: U1.14 27.3,69.53 6.35,69.53 4.76,68.26 4.76,50.16 7.72,46.99 7.72,33.97 9.21,32.7 10.79,32.7 11.43,33.34 11.43,36.04 LED2.A
  Top 0.406: IC8.4 47.62,27.94 46.35,29.21 46.35,37.47 50.64,41.75 | IC7.4 65.72,27.94 64.45,29.21 64.45,41.27 | IC6.4 83.82,27.94 82.55,29.21 82.55,36.83 78.74,41.27 v77.15,41.27
  Top 0.61: v56.52,41.27 64.45,41.27 v70.48,41.27
  Top 0.813: v44.77,62.87 49.21,58.42 49.21,43.18 50.64,41.75 51.12,41.27 v52.07,41.27
  Bottom 0.406: C8.1 29.84,63.77 U1.14 | v70.48,41.27 v77.15,41.27 | OUTPUT.5 50.72,13.34 43.81,13.34 38.1,19.05 38.1,36.83 44.13,42.86 49.53,42.86 51.12,41.27 v52.07,41.27
  Bottom 0.61: v52.07,41.27 v56.52,41.27 | U1.14 33.66,66.99 C5.2
  Bottom 0.813: U1.14 32.38,64.14 43.5,64.14 v44.77,62.87
-12V  (via drill 0.41, 0.51)
  Top 0.305: LED5.C 8.26,35.72 8.26,47.31 5.4,50.48 5.4,53.66 6.35,54.61 v11.11,54.61 | v16.19,54.61 29.21,54.61 29.84,53.98
  Top 0.406: IC8.11 42.55,27.94 43.81,29.21 43.81,37.47 v48.26,41.91 | IC7.11 60.64,27.94 61.91,29.21 v61.91,40.01 | IC6.11 78.74,27.94 80.01,29.21 80.01,37.47 77.79,40.01 v75.88,40.01 | 29.84,53.98 29.84,53.66
  Top 0.61: v55.24,40.01 v61.91,40.01
  Top 0.813: v48.26,41.91 47.62,42.86 47.62,57.78 46.35,59.05 35.24,59.05 29.84,53.66 U1.11
  Bottom 0.305: v11.11,54.61 v16.19,54.61
  Bottom 0.406: C6.1 31.75,52.39 31.11,51.75 U1.11 29.84,55.29 C9.2 | OUTPUT.4 52.51,14.29 44.13,14.29 39.05,19.37 39.05,36.51 44.45,41.91 v48.26,41.91
  Bottom 0.61: v61.91,40.01 v75.88,40.01
  Bottom 0.813: v55.24,40.01 50.16,40.01 v48.26,41.91
CH1_A+
  Top 0.254: ENCODER1.3 139.7,59.69 137.16,57.15 120.01,57.15 118.74,58.42 IC3.5
CH1_A-
  Top 0.254: ENCODER1.7 141.07,59.79 137.79,56.52 119.38,56.52 117.47,58.42 IC3.4
  Bottom 0.254: 141.07,57.24 ENCODER1.7
  Bottom 0.406: SJ2.2 141.07,57.24
CH1_B+
  Top 0.254: IC3.7 124.4,58.42 135.89,58.42 136.95,59.49 ENCODER1.4
CH1_B-
  Top 0.254: IC3.6 120.01,58.42 120.65,57.78 136.52,57.78 138.32,59.59 ENCODER1.8
  Bottom 0.254: 138.32,65.7 ENCODER1.8
  Bottom 0.406: SJ3.2 138.32,65.7
CH1_CMD
  Top 0.305: IC6.13 IC6.14 77.5,18.45 74.3,15.24 66.99,15.24 OUTPUT.1
CH1_DIR  (via drill 0.41)
  Top 0.254: IC10.21 108.87,50.32 v111.12,48.07
  Bottom 0.254: R19.1 OK2.6 148.9,27.94 116.84,27.94 112.39,32.38 112.39,40.32 111.12,41.59 v111.12,48.07
CH1_DIR_H
  Bottom 0.254: 137,11.27 138.43,9.91 143.19,9.91 143.82,10.48 143.82,11.75 145.73,13.65 149.86,13.65 R16.1
  Bottom 0.406: INTERFACE.4 137,11.27
CH1_DIR_L
  Top 0.254: OK2.3 151.13,17.14 147.32,13.34 136.17,13.34 INTERFACE.5
CH1_H  (via drill 0.41)
  Top 0.254: R38.1 v89.85,27.94 | IC10.2 94.54,46.91 89.85,42.23 v89.85,38.43
  Bottom 0.254: v89.85,27.94 v89.85,38.43
CH1_I+
  Top 0.254: ENCODER1.5 130.55,67.31 121.28,67.31 120.01,66.04 IC3.9
CH1_I-
  Top 0.254: IC3.8 124.4,66.04 128.27,66.04 133.5,60.81 ENCODER1.9
  Bottom 0.254: SJ4.2 132.1,60.81 ENCODER1.9
CH1_L
  Top 0.254: IC10.3 95.04,46.46 90.81,42.23 90.81,36.51 R39.1
CH1_QE_A  (via drill 0.41)
  Top 0.254: IC3.2 v114.94,61.59 | IC10.30 112.92,54.82 114.94,56.83 114.93,56.84 IC3.2
  Top 0.406: IC3.2
  Bottom 0.254: v114.94,61.59 R27.1
CH1_QE_B  (via drill 0.41)
  Top 0.254: IC3.1 113.66,58.73 v113.03,58.1 112.08,57.15 106.05,57.15 105.44,56.55 IC10.33
  Bottom 0.254: 116.39,62.36 114.3,62.36 113.67,61.59 113.03,60.96 v113.03,58.1
  Bottom 0.305: 116.39,62.36 R28.1
CH1_QE_I  (via drill 0.41)
  Top 0.254: IC3.14 113.67,63.18 v113.67,62.87 113.67,61.59 114.3,60.96 114.3,57.15 112.47,55.32 IC10.31
  Bottom 0.254: R29.1 115.25,63.18 113.98,63.18 v113.67,62.87
CH1_STEP  (via drill 0.41)
  Top 0.254: OK2.7 145.73,22.86 116.52,22.86 108.27,31.11 v108.27,37.47 | v106.05,46.24 105.34,46.24 102.77,48.82 IC10.18
  Bottom 0.254: OK2.7 148.59,23.5 | v106.05,46.24 106.48,46.24 106.68,46.04 106.68,39.05 v108.27,37.47
  Bottom 0.406: 148.59,23.5 R21.1
CH1_STEP_H
  Bottom 0.254: INTERFACE.2 142.38,11.57 145.73,14.92 146.37,14.92
  Bottom 0.406: 146.37,14.92 R15.1
CH1_STEP_L
  Bottom 0.254: OK2.2 147.32,16.83 145.73,16.83 145.09,16.19 145.09,15.56 140.8,11.27 INTERFACE.3
CH2_A+
  Top 0.254: IC4.5 118.74,44.45 120.01,43.18 137.16,43.18 139.7,45.72 ENCODER2.3
CH2_A-
  Top 0.254: IC4.4 117.47,44.45 119.38,42.55 137.79,42.55 141.07,45.82 ENCODER2.7
  Bottom 0.254: 141.07,43.27 ENCODER2.7
  Bottom 0.406: SJ5.2 141.07,43.27
CH2_B+
  Top 0.254: IC4.7 124.4,44.45 135.89,44.45 136.95,45.52 ENCODER2.4
CH2_B-
  Top 0.254: IC4.6 120.01,44.45 120.65,43.81 136.52,43.81 138.32,45.62 ENCODER2.8
  Bottom 0.254: ENCODER2.8 138.32,53.31
  Bottom 0.406: 138.32,53.31 SJ6.2
CH2_CMD
  Top 0.305: IC7.13 IC7.14 59.37,18.41 60.7,17.08 OUTPUT.2
CH2_DIR  (via drill 0.41)
  Top 0.254: IC10.32 106.42,55.82 v107.02,56.26
  Bottom 0.254: R25.1 OK4.6 137.79,27.37 116.52,27.37 110.17,33.72 110.17,39.69 109.22,40.64 109.22,55.24 108.18,56.29 v107.02,56.26
CH2_DIR_H
  Bottom 0.254: INTERFACE.8 126.21,11.27 127.63,9.91 132.08,9.91 132.71,10.48 132.71,11.75 134.62,13.65 138.11,13.65 R24.1
CH2_DIR_L
  Top 0.254: INTERFACE.9 126.41,14.61 136.84,14.61 139.38,17.14 OK4.3
CH2_H  (via drill 0.41)
  Top 0.254: R40.1 v71.75,27.94 | v88.39,43.18 88.39,44.58 92.14,48.32 IC10.64
  Bottom 0.254: v71.75,27.94 71.75,36.51 73.66,38.42 86.68,38.42 88.39,40.01 v88.39,43.18
CH2_I+
  Top 0.254: IC4.9 120.01,52.07 121.28,53.34 130.81,53.34 134.21,49.94 ENCODER2.5
CH2_I-
  Top 0.254: IC4.8 124.4,52.07 128.27,52.07 133.5,46.84 ENCODER2.9
  Bottom 0.254: SJ7.2 132.1,46.84 ENCODER2.9
CH2_L
  Top 0.254: R41.1 71.75,38.1 75.88,42.23 88.9,42.23 94.04,47.37 IC10.1
CH2_QE_A  (via drill 0.41)
  Top 0.254: IC4.2 v114.93,47.62 113.67,47.62 109.97,51.32 IC10.23
  Bottom 0.254: R32.1 v114.93,47.62
  Bottom 0.406: R32.1
CH2_QE_B  (via drill 0.41)
  Top 0.254: v113.66,43.81 IC4.1 | IC4.1 113.67,46.67 109.52,50.82 IC10.22
  Top 0.305: IC4.1
  Bottom 0.254: 116.14,48.51 114.55,48.51 113.66,47.62 v113.66,43.81
  Bottom 0.406: 116.14,48.51 R33.1
CH2_QE_I  (via drill 0.41)
  Top 0.254: v113.66,48.9 IC4.14 | IC10.16 101.54,47.37 105.09,43.81 111.12,43.81 v112.71,42.23
  Bottom 0.254: R34.1 115.25,49.21 113.98,49.21 v113.66,48.9 112.71,47.94 v112.71,42.23
CH2_STEP  (via drill 0.41)
  Top 0.254: OK4.7 136.84,25.08 135.25,23.5 116.84,23.5 109.22,31.11 v109.22,39.37 | IC10.29 102.87,54.32 v103.19,54
  Bottom 0.254: OK4.7 136.84,23.5 R26.1 | v103.19,54 104.11,54.93 106.36,54.93 108.27,53.02 108.27,40.32 v109.22,39.37
CH2_STEP_H
  Bottom 0.254: INTERFACE.6 131.35,11.34 R23.1
CH2_STEP_L
  Bottom 0.254: OK4.2 135.57,16.83 133.99,16.83 133.35,16.19 133.35,14.92 129.69,11.27 INTERFACE.7
CH3_A+
  Top 0.254: ENCODER3.3 139.7,32.07 136.84,29.21 125.09,29.21 123.83,30.48 123.83,33.66 121.92,35.56 IC5.5
CH3_A-
  Top 0.254: ENCODER3.7 141.07,32.17 137.47,28.57 124.77,28.57 123.19,30.16 123.19,33.02 121.92,34.29 IC5.4
  Bottom 0.254: SJ8.2 141.07,30.16 ENCODER3.7
CH3_B+
  Top 0.254: ENCODER3.4 136.95,32.18 136.2,31.43 135.25,31.43 132.08,34.61 132.08,35.88 129.22,38.74 123.19,38.74 122.56,38.1 IC5.7
CH3_B-
  Top 0.254: ENCODER3.8 138.32,31.97 137.16,30.8 134.93,30.8 131.44,34.29 131.44,35.56 128.91,38.1 123.51,38.1 122.24,36.83 IC5.6
  Bottom 0.254: ENCODER3.8 138.32,39.34
  Bottom 0.406: 138.32,39.34 SJ9.2
CH3_CMD
  Top 0.305: IC8.13 IC8.14 41.27,18.41 44.45,15.24 54.3,15.24 OUTPUT.3
CH3_DIR  (via drill 0.41)
  Top 0.254: IC10.24 104.47,51.82 v104.78,52.12
  Bottom 0.254: R20.1 OK3.6 126.68,26.8 116.2,26.8 109.22,33.78 109.22,38.1 107.31,40.01 107.31,51.44 106.63,52.12 v104.78,52.12
CH3_DIR_H
  Bottom 0.254: INTERFACE.12 115.11,10.94 116.2,9.91 121.06,9.91 121.7,10.48 121.7,11.75 123.82,13.65 126.36,13.65 R18.1
CH3_DIR_L
  Top 0.254: INTERFACE.13 115.05,15.88 126.36,15.88 127.63,17.14 OK3.3
CH3_H  (via drill 0.41, 0.51)
  Top 0.254: R42.1 v53.66,27.94 | IC10.62 91.23,49.32 86.04,44.13 v86.04,43.81
  Top 0.305: v53.66,27.94
  Bottom 0.254: v53.66,27.94 53.66,36.51 56.2,39.05 85.09,39.05 86.04,40.01 v86.04,43.81
CH3_I+
  Top 0.254: IC5.9 115.25,36.83 114.94,37.14 114.94,38.42 116.52,40.01 130.17,40.01 134.21,35.97 ENCODER3.5
CH3_I-
  Top 0.254: IC5.8 117.41,39.37 129.54,39.37 132.72,36.2 132.72,35.24 135.09,32.87 ENCODER3.9
  Bottom 0.254: 132.1,32.87 ENCODER3.9
  Bottom 0.305: SJ10.2 132.1,32.87
CH3_L
  Top 0.254: R43.1 51.76,38.74 55.88,42.86 86.68,42.86 87.31,43.5 87.31,44.58 91.56,48.82 IC10.63
CH3_QE_A  (via drill 0.41 pad 0.81)
  Top 0.254: IC10.13 100.04,45.38 104.14,41.27 109.54,41.27 112.39,38.42 112.39,31.11 114.62,28.89 121.6,28.89 122.56,29.84 122.56,31.11 121.92,31.75 IC5.2 120.33,31.75 118.62,33.47 v118.62,33.97
  Bottom 0.254: v118.62,33.97 118.62,34.8 R35.1
CH3_QE_B  (via drill 0.41 pad 0.81)
  Top 0.254: IC10.14 100.54,45.83 104.46,41.91 109.86,41.91 113.03,38.73 113.03,31.43 114.94,29.53 120.71,29.53 121.34,30.16 IC5.1 119.06,30.48 v118.62,30.8
  Bottom 0.254: v118.62,30.8 118.62,31.62 R36.1
CH3_QE_I  (via drill 0.41 pad 0.81)
  Top 0.254: IC10.17 102.49,48.32 106.36,44.45 111.76,44.45 113.98,42.23 113.98,31.5 115,30.48 IC5.14 116.84,30.48 117.73,31.24 117.73,36.26 v118.62,37.15
  Bottom 0.254: R37.1 118.62,37.97 v118.62,37.15
CH3_STEP  (via drill 0.41)
  Top 0.254: OK3.7 125.09,25.08 124.14,24.13 117.32,24.13 111.12,30.32 v111.12,36.67 | IC10.15 101.04,46.6 104.78,42.86 v110.17,42.86
  Bottom 0.254: v111.12,36.67 111.12,40.01 110.17,40.96 v110.17,42.86 | R22.1 125.09,23.49 OK3.7
CH3_STEP_H
  Bottom 0.254: INTERFACE.10 120.62,11.72 123.5,14.61
  Bottom 0.406: 123.5,14.61 123.5,15.24 R17.1
CH3_STEP_L
  Bottom 0.254: 121.92,16.19 121.92,16.2 | OK3.2 123.82,16.83 122.55,16.83 121.92,16.2 | INTERFACE.11 118.58,11.27 121.92,14.61 121.92,16.2
DI1
  Top 0.254: IC10.4 95.54,46.01 91.44,41.91 91.44,19.05 91.12,18.73 80.96,18.73 77.78,15.55 OK1.16
  Bottom 0.254: OK1.16 77.78,12.06 R10.1
DI1_CON
  Bottom 0.254: 138.03,5.83 R6.1 138.24,6.03 INTERFACE.16
DI2
  Top 0.254: IC10.5 96.04,45.56 92.08,41.59 92.08,18.73 91.44,18.1 84.14,18.1 82.86,16.82 OK1.14
  Bottom 0.254: OK1.14 82.86,12.06 R11.1
DI2_CON
  Bottom 0.254: R7.1 135.49,6.41 INTERFACE.17
DI3
  Top 0.254: IC10.6 96.54,45.1 92.71,41.27 92.71,18.41 91.76,17.46 88.9,17.46 87.94,16.51 OK1.12
  Bottom 0.254: OK1.12 87.94,12.06 R12.1
DI3_CON
  Bottom 0.254: R8.1 132.72,6.87 INTERFACE.18
DI4
  Top 0.254: IC10.8 97.54,43.56 96.52,42.55 94.93,42.55 93.34,40.96 93.34,16.83 93.02,16.51 OK1.10
  Bottom 0.254: OK1.10 93.02,12.06 R13.1
DI4_CON
  Bottom 0.254: R9.1 128.58,5.4 129.96,6.77 INTERFACE.19
DI_COM_CON
  Top 0.254: 85.4,4.13 80.64,4.13 80.33,4.45 80.32,4.45 OK1.2 | 85.4,4.13 90.48,4.13 | 90.48,4.13 95.57,4.13 | 95.57,4.13 95.56,4.45 OK1.8 | 95.57,4.13 121.02,4.13 INTERFACE.20 | OK1.4 85.4,4.13 | OK1.6 90.48,4.13
  Bottom 0.254: C12.2 85.4,8.89 OK1.4 | C14.2 95.56,8.89 OK1.8 | 90.48,8.57 OK1.6 | 80.32,8.57 OK1.2
  Bottom 0.406: 80.32,8.57 C11.2 | 90.48,8.57 C13.2
DO1  (via drill 0.41)
  Top 0.254: IC10.52 92.22,54.32 91.72,54.82 90.6,54.82 v89.85,54.07
  Bottom 0.254: v89.85,54.07 89.85,51.12 97.47,44.13 97.47,42.55 95.57,40.64 94.3,40.64 93.03,39.37 93.03,27.62 95.25,25.4 IC2.14
DO1_CON
  Top 0.254: INTERFACE.21 124.44,8.24
  Top 0.406: 124.44,8.24 119.38,5.08 100.65,5.08 98.42,7.3 98.42,19.68 97.79,20.32 IC2.16
DO1H_CON
  Bottom 0.406: Q1.3 29.02,21.55 D1.1 29.85,14.29 31.43,12.7 K1.8
DO2  (via drill 0.41)
  Top 0.254: IC10.53 91.28,53.82 v91.12,54.07
  Bottom 0.254: v91.12,54.07 91.12,50.8 98.11,44.45 98.11,42.23 95.89,40.01 94.61,40.01 93.66,39.05 93.66,34.61 95.25,33.02 IC2.11
DO2_CON
  Top 0.406: INTERFACE.22 116.84,5.71 100.97,5.71 99.06,7.62 99.06,20.32 97.79,21.59 95.25,21.59 94.61,22.23 94.61,37.47 95.25,38.1 IC2.9
DO3
  Top 0.254: IC10.11 99.04,44.47 101.6,41.91 101.6,26.67 102.87,25.4 IC2.3
DO3_CON
  Top 0.406: INTERFACE.23 115.27,6.67 110.81,6.67 106.68,10.79 106.68,19.05 105.41,20.32 IC2.1
DO4
  Top 0.254: IC10.12 99.54,44.92 102.23,42.23 102.23,33.66 102.87,33.02 IC2.6
DO4_CON
  Top 0.254: IC2.8 105.41,38.1
  Top 0.406: INTERFACE.24 112.84,9.84 109.54,9.84 107.95,11.43 107.95,21.27 106.68,22.54 106.68,36.83 105.41,38.1
DO_COM_CON
  Top 0.254: INTERFACE.25 110.01,8.42 | 97.47,22.86 IC2.15 | IC2.2 105.41,22.86
  Top 0.406: 110.01,8.42 107.31,11.11 107.31,20.95 105.41,22.86 106.05,23.5 106.05,34.92 105.41,35.56 IC2.7 | IC2.10 97.79,35.56 98.42,34.92 98.42,23.81 97.47,22.86 IC2.2
  Bottom 0.406: SJ1.2 IC2.15
GND  (via drill 0.41, 0.41 pad 0.81)
  Top 0.254: LED6.C LED7.C LED8.C | C41.1 106.63,53.02 104.46,53.02 103.75,52.32 IC10.25 99.94,52.32 v99.69,52.07 IC10.EXP v95.89,52.07 95.64,52.32 IC10.56 84.07,52.32 83.82,52.07 C43.1 | C39.1 98.04,41.01 IC10.9 98.04,49.91 v97.79,50.16 | 97.54,59.56 IC10.41 97.54,54.23 v97.79,53.98 | v97.79,50.16 97.41,50.16 | C40.2 105.5,49.82 IC10.20 98.14,49.82 v97.79,50.16 | 97.54,59.56 arc90 97.16,59.82 96.84,60.33 | 97.54,59.56 97.54,60.64 | IC5.12 115.57,33.02 v114.94,33.02
  Top 0.406: IC9.14 58.72,51.91 | 58.72,51.91 60.02,51.91 | IC9.12 60.02,51.91 | 60.02,51.91 64.14,51.91 C37.2 | IC9.1 57.41,46.73 57.15,46.99 | 58.72,51.91 57.15,51.91 56.87,51.63 56.87,47.27 57.15,46.99 | C35.- 53.66,48.26 C36.2 57.15,46.99 | 41.86,52.34 IC1.7 | IC4.12 116.2,52.07 119.06,55.24 v121.28,55.24
  Top 0.61: IC3.12 116.2,63.5 117.47,62.23 ENCODER1.G1 | ENCODER1.G2 146.6,62.23 ENCODER1.1 ENCODER2.1 | ENCODER2.1 146.6,48.26 ENCODER2.G2 | ENCODER2.G1 117.47,48.26 116.2,49.53 IC4.12 | ENCODER2.1 ENCODER3.1 146.6,34.29 ENCODER3.G2 153.67,32.84 OK2.5 153.67,26.04 152.72,26.99 143.19,26.99 OK4.5 140.65,26.99 131.13,26.99 130.17,26.03 OK3.5 | OUTPUT.6 69.06,8.74 OUTPUT.G2 | OUTPUT.9 46.86,8.74 OUTPUT.G1
  Top 0.813: IC1.7 IC1.6 IC1.5 | IC1.2 IC1.3
  Top 1.27: IC1.7 IC1.2 | U1.9 21.59,51.75 14.61,44.45 U2.6
  Bottom 0.406: R5.2 R4.2 R2.2 R3.2 | R31.1 146.37,48.5 ENCODER2.1 145.18,51.79 C16.1 | 121.28,62.23 124.46,60.96 124.46,56.51 v121.28,55.24 | 121.28,48.26 124.46,46.99 124.46,43.18 | 45.09,27.62 45.09,32.7 | C25.1 45.09,27.62 | C32.2 45.09,27.62 | 45.09,32.7 C26.2 46.67,32.7 47.62,31.75 50.17,31.75 R67.1 | 45.09,32.7 45.08,32.7 R72.1 | R64.2 43.81,20.64 43.18,21.27 43.18,23.81 45.09,24.45 45.09,27.62 | C23.1 63.18,27.62 | 63.18,27.62 C31.2 | 63.18,27.62 63.18,24.45 61.28,23.81 61.28,21.27 61.91,20.64 R60.2 61.91,20 61.91,17.78 62.08,17.62 OUTPUT.6 | R70.1 63.18,32.7 | 63.18,32.7 C24.2 64.77,32.38 65.09,32.38 65.72,31.75 68.26,31.75 R63.1 | 63.18,32.7 63.18,27.62 | R68.1 81.28,32.7 | 81.28,32.7 C22.2 83.19,32.7 84.14,31.75 86.36,31.75 87.31,30.8 R59.1 | C30.2 81.28,27.62 | 81.28,27.62 C21.1 | 81.28,27.62 81.28,24.45 80.96,24.13 79.69,24.13 79.38,23.81 79.38,21.27 80.01,20.64 R56.2 80.64,19.68 83.5,18.73 73.66,18.73 63.98,8.74 OUTPUT.6 | 81.28,32.7 81.28,27.62 | OUTPUT.9 OUTPUT.8 OUTPUT.7 OUTPUT.6 | C10.2 32.07,40.64 | C15.1 145.18,65.76 ENCODER1.1 | C17.1 145.18,37.82 ENCODER3.1
  Bottom 0.61: INTERFACE.G1 104.58,8.42 | C8.2 26.04,63.18 26.04,63.5 | C9.1 26.04,55.56 26.04,55.88 6.35,55.88 5.08,54.61 5.08,45.25 5.71,44.62 R5.2 | IC1.7 41.91,50.8 C7.2
  Bottom 0.813: INTERFACE.1 150.31,11.27 INTERFACE.G2
  Bottom 1.27: U1.16 26.04,63.5 26.04,55.88 26.04,54.61 U1.9 | U2.6 18.1,40.64 32.07,40.64 35.56,40.64 37.15,42.23 37.15,45.09 IC1.7
  other vias: 81.92,50.7 83.5,40.32 109.86,64.14 40.01,14.61 98.74,54.93 96.84,54.93 100.65,53.02 100.65,51.12 98.74,49.21 96.84,49.21 94.93,51.12 94.93,53.02 26.04,59.69 8.89,59.69 83.82,66.04 63.5,58.42 30.48,21.27
  pour Top (isolate 0.254, rank 2): -40.64,86.36 184.15,86.36 184.15,-7.62 -40.64,-7.62
  pour Bottom (isolate 0.254, rank 2): -8.89,86.36 223.52,86.36 223.52,-7.62 -8.89,-7.62
  cutout Top: 93.98,55.88 101.6,55.88 101.6,48.26 93.98,48.26
  cutout Top: 90.17,59.37 arc-90 89.85,59.69 89.85,67.94 arc-90 90.17,68.26 106.68,68.26 arc-90 107,67.63 107,59.37 arc-90 106.68,59.37 98.74,59.37 98.74,59.69 106.68,59.69 106.68,67.94 90.17,67.94 90.17,59.69 97.16,59.69 arc-90 97.54,59.37 97.47,57.15 97.16,57.15 97.16,58.42 arc90 96.84,59.37
  cutout Bottom (isolate 0.254): 32.07,16.51 36.2,20.64 36.83,20.64 37.47,20 37.47,14.61 35.88,13.34 35.88,8.26 36.51,7.62 36.51,4.13 35.56,3.17 24.13,3.17 23.18,4.13 23.18,7.3 24.13,8.26 25.72,8.26 27.3,9.84 30.48,9.84 32.07,11.43
LED_ERROR  (via drill 0.41)
  Top 0.254: IC10.60 90.33,50.32 85.31,45.31 v74.61,45.31
  Bottom 0.254: v74.61,45.31 R81.1
LED_READY  (via drill 0.41)
  Top 0.254: IC10.58 89.45,51.32 87.34,49.21 77.38,49.21 v74.61,51.66
  Bottom 0.254: v74.61,51.66 R79.1
LED_STATE  (via drill 0.41)
  Top 0.254: IC10.59 89.87,50.82 87.53,48.48 v74.61,48.48
  Bottom 0.254: v74.61,48.48 R80.1
MSCK
  Top 0.254: IC10.51 92.5,54.82 92,55.32 85.41,55.32 83.5,57.15 83.19,57.47 80.33,57.47 79.88,57.91 79.88,62.99 79.38,63.5 IC11.6
MSDI
  Top 0.254: IC10.48 93.75,56.82 87.01,56.82 85.72,58.1 85.72,61.59 85.09,62.23 IC11.2
MSDO
  Top 0.254: IC10.49 92.87,55.82 92.37,56.32 86.49,56.32 85.09,57.72 85.09,61.28 84.77,61.59 82.87,61.59 79.69,64.77 IC11.5
N$1
  Bottom 0.254: 87.63,33.02 IC6.6 82.89,35.24
  Bottom 0.305: R59.2 87.63,33.02
  Bottom 0.406: 82.89,35.24 R51.1
N$2
  Bottom 0.254: 80.97,22.86 82.55,22.86 | 83.19,22.86 IC6.2
  Bottom 0.406: R56.1 80.97,22.86 | 82.55,22.86 82.87,22.54 R50.2 83.19,22.86
N$3  (via drill 0.41)
  Top 0.406: LED1.C 4.92,32.7 v3.81,32.7
  Bottom 0.406: R1.1 3.34,32.23 v3.81,32.7
N$4
  Top 1.676: L1.B 22.68,19.82 U2.1
N$5
  Top 0.254: C18.1 IC6.1 82.55,20.32 78.74,24.13 75.25,24.13 74.93,23.81 R57.2
  Bottom 0.254: 83.19,20.32 IC6.1
  Bottom 0.406: R50.1 83.19,20.32
N$6
  Top 0.254: IC6.3 87.66,22.86
  Top 0.406: 87.66,22.86 R44.2
  Bottom 0.254: 82.87,25.4 IC6.3
  Bottom 0.406: C21.2 82.87,25.4
N$7
  Top 0.254: C18.2 R44.1 89.85,23.82 89.53,24.13 88.27,24.13 87.95,24.45 R38.2
N$8
  Top 0.254: R74.2 75.25,25.4 IC6.12
  Bottom 0.254: 79.69,25.4 IC6.12
  Bottom 0.406: C30.1 79.69,25.4
N$9
  Top 0.254: R74.1 76.52,29.21 78.74,29.21 79.38,29.84 79.38,33.66 77.5,35.53 IC6.8 75.25,35.56 | 75.25,35.56 R69.2 arc-90 75.25,35.56
N$10
  Top 0.254: R69.1 75.25,33.02 IC6.9
  Bottom 0.254: R58.1 79.06,34.29 78.11,34.29 77.5,33.69 IC6.9
N$11
  Top 0.254: IC6.7 87.66,33.02
  Top 0.406: 87.66,33.02 C27.2
  Bottom 0.254: IC6.7 83.53,37.15 R51.2 R58.2
N$12
  Top 2.032: POWER.1 8.59,5.71 F1.1
N$13
  Top 0.254: IC6.5 R45.2
  Bottom 0.254: 82.87,30.48 IC6.5
  Bottom 0.406: C22.1 82.87,30.48
N$14
  Top 0.254: R45.1 C27.1 89.85,33.98 89.53,34.29 88.27,34.29 87.95,34.61 R39.2
N$15
  Top 0.254: R57.1 73.98,20.64 73.66,20.95 73.66,29.21 74.93,30.48 IC6.10
  Bottom 0.254: IC6.10 80.01,30.48
  Bottom 0.305: 80.01,30.48 R68.2
N$16
  Bottom 0.254: OK4.4 141.92,15.24
  Bottom 0.406: 141.92,15.24 R24.2
N$17
  Bottom 0.254: OK4.1 135.57,19.37 137.47,19.37 138.11,18.73 138.11,16.51 R23.2
N$18
  Bottom 0.254: OK3.4 130.17,15.24
  Bottom 0.406: 130.17,15.24 R18.2
N$19
  Bottom 0.254: OK3.1 123.82,19.37 125.73,19.37 126.36,18.73 126.36,16.51 R17.2
N$20
  Bottom 0.254: 69.53,33.02 IC7.6 66.68,33.02 R53.1
  Bottom 0.305: R63.2 69.53,33.02
N$21
  Bottom 0.254: 65.09,22.86 IC7.2 | 64.45,22.86 63.18,22.86
  Bottom 0.406: 65.09,22.86 R52.2 64.45,22.86 | 63.18,22.86 62.86,22.54 R60.1
N$22
  Top 0.254: R61.2 56.83,23.81 57.15,24.13 60.64,24.13 64.45,20.32 IC7.1 C19.1
  Bottom 0.254: 65.09,20.32 IC7.1
  Bottom 0.406: R52.1 65.09,20.32
N$23
  Top 0.254: IC7.3 69.53,22.86
  Top 0.406: 69.53,22.86 R46.2
  Bottom 0.254: 64.77,25.4 IC7.3
  Bottom 0.406: C23.2 64.77,25.4
N$24
  Top 0.254: C19.2 R46.1 71.75,23.82 71.44,24.13 70.17,24.13 69.85,24.45 R40.2
  Top 0.406: R40.2
N$25
  Top 0.254: 57.15,25.4 IC7.12
  Top 0.406: R75.2 57.15,25.4
  Bottom 0.254: 61.59,25.4 IC7.12
  Bottom 0.406: C31.1 61.59,25.4
N$26
  Top 0.254: R75.1 58.42,29.21 60.64,29.21 61.28,29.84 61.28,33.66 IC7.8 56.83,35.56 R71.2
N$27
  Top 0.254: IC7.9 56.83,33.02
  Top 0.305: 56.83,33.02 R71.1
  Bottom 0.254: IC7.9 59.37,33.66 60.01,34.29 60.96,34.29 R62.1
  Bottom 0.406: R62.1
N$28
  Top 0.254: IC7.7 69.53,33.02 C28.2
  Bottom 0.254: IC7.7 65.41,37.15 R53.2 R62.2
N$29
  Top 0.254: IC7.5 R47.2
  Bottom 0.254: 64.77,30.48 IC7.5
  Bottom 0.406: C24.1 64.77,30.48
N$30
  Top 0.254: R41.2 69.85,34.61 70.17,34.29 71.44,34.29 71.75,33.98 C28.1 R47.1
  Top 0.406: R41.2
N$31
  Top 0.254: IC7.10 56.83,30.48 55.56,29.21 55.56,20.95 55.88,20.64 R61.1
  Bottom 0.254: 61.59,30.48 IC7.10
  Bottom 0.406: R70.2 61.59,30.48
N$32
  Bottom 0.254: 51.12,33.02 IC8.6 48.58,33.02 R55.1
  Bottom 0.406: R67.2 51.12,33.02
N$33
  Bottom 0.254: IC8.2 46.67,22.86 44.13,22.86
  Bottom 0.406: R54.2 46.67,22.86 | R64.1 44.13,22.86
N$34
  Top 0.254: R65.2 38.73,23.81 39.05,24.13 42.55,24.13 46.35,20.32 IC8.1 C20.1
  Bottom 0.254: 46.67,20.32 IC8.1
  Bottom 0.406: R54.1 46.67,20.32
N$35
  Top 0.254: IC8.3 49.22,25.4 R48.2
  Bottom 0.254: 46.67,25.4 IC8.3
  Bottom 0.406: C25.2 46.67,25.4
N$36
  Top 0.254: C20.2 R48.1 | R48.1 53.66,23.81 53.34,24.13 52.07,24.13 51.75,24.45 R42.2
  Top 0.406: R48.1 | R42.2
N$37
  Top 0.254: IC8.12 38.73,25.4
  Top 0.305: 38.73,25.4 R76.2
  Bottom 0.254: 43.49,25.4 IC8.12
  Bottom 0.406: C32.1 43.49,25.4
N$38
  Top 0.254: R76.1 38.73,27.94 40.01,29.21 42.55,29.21 43.18,29.84 43.18,33.66 IC8.8 39.05,35.56
  Top 0.406: R73.2 39.05,35.56
N$39
  Top 0.254: 39.05,33.02 IC8.9
  Top 0.406: R73.1 39.05,33.02
  Bottom 0.254: R66.1 42.87,34.29 41.91,34.29 41.27,33.66 IC8.9
N$40
  Top 0.254: C29.2 IC8.7
  Bottom 0.254: R66.2 R55.2 | R55.2 47.31,37.15 IC8.7
  Bottom 0.406: R55.2
N$41
  Top 0.254: R49.2 IC8.5
  Bottom 0.254: 46.67,30.48 IC8.5
  Bottom 0.406: C26.1 46.67,30.48
N$42
  Top 0.254: R49.1 C29.1 R43.2
N$43
  Top 0.254: R65.1 37.78,20.64 37.47,20.95 37.47,28.89 39.05,30.48 IC8.10
  Top 0.406: R65.1
  Bottom 0.254: 43.49,30.48 IC8.10
  Bottom 0.406: R72.2 43.49,30.48
N$45  (via drill 0.41)
  Top 0.254: v67.63,51.66 LED6.A
  Bottom 0.254: R79.2 v67.63,51.66
N$47  (via drill 0.41)
  Top 0.254: v67.63,48.48 LED7.A
  Bottom 0.254: R80.2 v67.63,48.48
N$48  (via drill 0.41)
  Top 0.254: v67.63,45.31 LED8.A
  Bottom 0.254: R81.2 v67.63,45.31
N$50  (via drill 0.41)
  Top 0.305: IC9.4 59.37,49.59 v58.47,50.49
  Bottom 0.305: C34.2 57.89,50.48 v58.47,50.49
N$51  (via drill 0.41)
  Top 0.305: IC9.2 58.06,48.18 v58.47,48.59
  Bottom 0.305: C34.1 57.88,48.58 v58.47,48.59
N$52  (via drill 0.41)
  Top 0.305: IC9.6 60.66,48.39 arc-90 v60.84,48.59
  Bottom 0.305: 62.23,48.26 61.9,48.59 v60.84,48.59
  Bottom 0.406: C33.2 62.23,48.26
N$53  (via drill 0.41)
  Top 0.305: IC9.5 60.01,49.74 v60.84,50.48
  Bottom 0.305: v60.84,50.48 60.98,50.48 C33.1
  Bottom 0.406: C33.1 62.23,50.8
N$54
  Top 0.305: IC9.3 58.72,45.06 58.42,44.77 54.29,44.77 52.7,46.35 C36.1
N$55
  Top 0.406: IC9.7 61.31,47.34 62.55,48.58 C37.1
N$56
  Bottom 0.254: R7.2 131.94,2.86 84.13,2.86 82.86,4.13 OK1.3 82.86,8.89 C12.1
N$58  (via drill 0.41)
  Top 0.406: LED2.C 4.92,39.05 v3.81,39.05
  Bottom 0.305: v3.81,39.05 R2.1
N$65  (via drill 0.41)
  Top 0.406: LED3.C 4.92,42.23 v3.81,42.23
  Bottom 0.305: v3.81,42.23 R4.1
N$67
  Bottom 0.254: R78.1 R77.1 68.58,60.07 C38.2
N$69
  Bottom 0.254: Q1.1 R14.2
N$70
  Bottom 0.254: R8.2 129.35,3.49 88.9,3.49 87.94,4.45 OK1.5 87.94,8.57
  Bottom 0.406: 87.94,8.57 C13.1
N$71
  Bottom 0.254: 125.73,5.08 124.77,4.13 93.98,4.13 93.02,5.08 OK1.7 93.02,8.89 C14.1
  Bottom 0.406: 125.73,5.08 R9.2
N$72
  Bottom 0.254: R6.2 134.43,2.22 79.69,2.22 77.78,4.13 OK1.1 77.78,8.57
  Bottom 0.406: 77.78,8.57 C11.1
N$73
  Bottom 0.254: OK2.4 153.67,15.56
  Bottom 0.406: 153.67,15.56 R16.2
N$74
  Bottom 0.254: R15.2 149.86,16.51 149.86,18.73 149.22,19.37 147.32,19.37 OK2.1
N$75  (via drill 0.41)
  Top 0.406: LED4.C 4.92,45.4 v3.81,45.4
  Bottom 0.305: v3.81,45.4 R5.1
N$76  (via drill 0.41)
  Top 0.406: LED5.A 4.92,35.88 v3.81,35.88
  Bottom 0.305: v3.81,35.88 R3.1
OSC1I
  Top 0.254: 101.28,62.55 100.2,62.55 98.54,60.88 IC10.39 | 101.28,62.55 Q2.2 | C45.2 101.28,62.55
OSC1O
  Top 0.254: IC10.40 98.04,61.03 96.52,62.55 95.57,62.55 C46.2
  Top 0.406: 95.57,62.55 Q2.1
PGEC
  Top 0.254: IC10.44 96.04,57.53 95.75,57.82 89.19,57.82 88.4,58.74 88.4,66.36 87.45,67.31 76.83,67.31 73.66,63.18 71.12,63.18 70.17,64.14 70.17,65.72 71.44,66.99 72.33,66.99 ICSP.5
PGED
  Top 0.254: IC10.43 96.54,57.77 95.98,58.32 89.53,58.32 88.9,59.05 88.9,66.99 87.95,67.94 76.52,67.94 74.04,64.52 ICSP.4
REF
  Bottom 0.254: SJ4.1 136.71,67.63 139.38,67.63 139.82,67.18 SJ3.1 | SJ7.1 137.03,54.61 140.01,54.61 139.82,54.48 | SJ10.1 137.03,40.64 140.01,40.64 139.82,40.51 | 142.55,33.66 142.68,33.53
  Bottom 0.406: SJ3.1 139.82,65.91 141.09,64.45 141.09,62.87 142.55,61.59 142.55,57.28 SJ2.1 142.68,56.07 141.22,54.61 140.01,54.61 | 139.82,54.48 SJ6.1 139.82,51.94 141.06,50.8 141.06,48.9 142.55,47.62 142.55,43.31 SJ5.1 | 139.82,40.51 SJ9.1 139.82,37.97 141.06,36.83 141.06,34.92 142.55,33.66 | R31.2 R30.1 148.27,43.49 147.95,43.18 SJ5.1 | SJ5.1 142.68,42.35 140.97,40.64 140.01,40.64 | 142.68,33.53 SJ8.1
RO1  (via drill 0.41)
  Top 0.254: v52.07,43.5 84.45,43.5 90.78,49.82 IC10.61
  Bottom 0.254: v52.07,43.5 43.5,43.5 34.92,34.92 R14.1
RO1_COM_CON
  Bottom 0.61: K1.3 34.09,14.92 34.09,9.84 READY.2
RO1_NC_CON
  Bottom 0.61: K1.2 35.17,13.89 35.17,6.03 READY.3
RO1_NO_CON
  Bottom 0.61: K1.4 33.02,16.19 33.02,10.79 31.11,8.89 27.94,8.89 24.84,5.79 READY.1
RS232_RX
  Top 0.254: IC9.8 61.97,44.82 61.28,44.13 53.02,44.13 51.12,46.04 51.12,59.37 53.98,62.23 59.69,62.23 60.2,62.74 RS232.2
RS232_TX
  Top 0.254: 59.37,53.16 59.37,55.56 60.96,57.15 60.96,59.44 RS232.3
  Top 0.305: 59.37,53.16 IC9.13
UART_RX
  Top 0.254: IC9.9 62.47,53.66 83.19,53.66 84.02,52.82 IC10.55
  Top 0.305: 62.01,53.2 arc90 IC9.9
UART_TX
  Top 0.254: IC9.11 60.66,54 60.96,54.29 83.5,54.29 84.48,53.31 IC10.54

## Text on the board
Bottom: v1.2.0 rev.1
tNames: READY | STATE | ERROR | 3V3 | 5V | +12V | -12V | 24V | 3A | + | 24V | - | NO | COM | NC